# Altium PCB ECE1895_Upsilon_PCB_Iteration1.PcbDoc
Units mil, origin at the board's own origin, x right, y up, seen from the top; angles counter-clockwise.
Board outline 3585 x 2320 mil, 2 copper layers (Top Layer, Bottom Layer); 22 components, 22 nets, 108 pads, 0 vias.
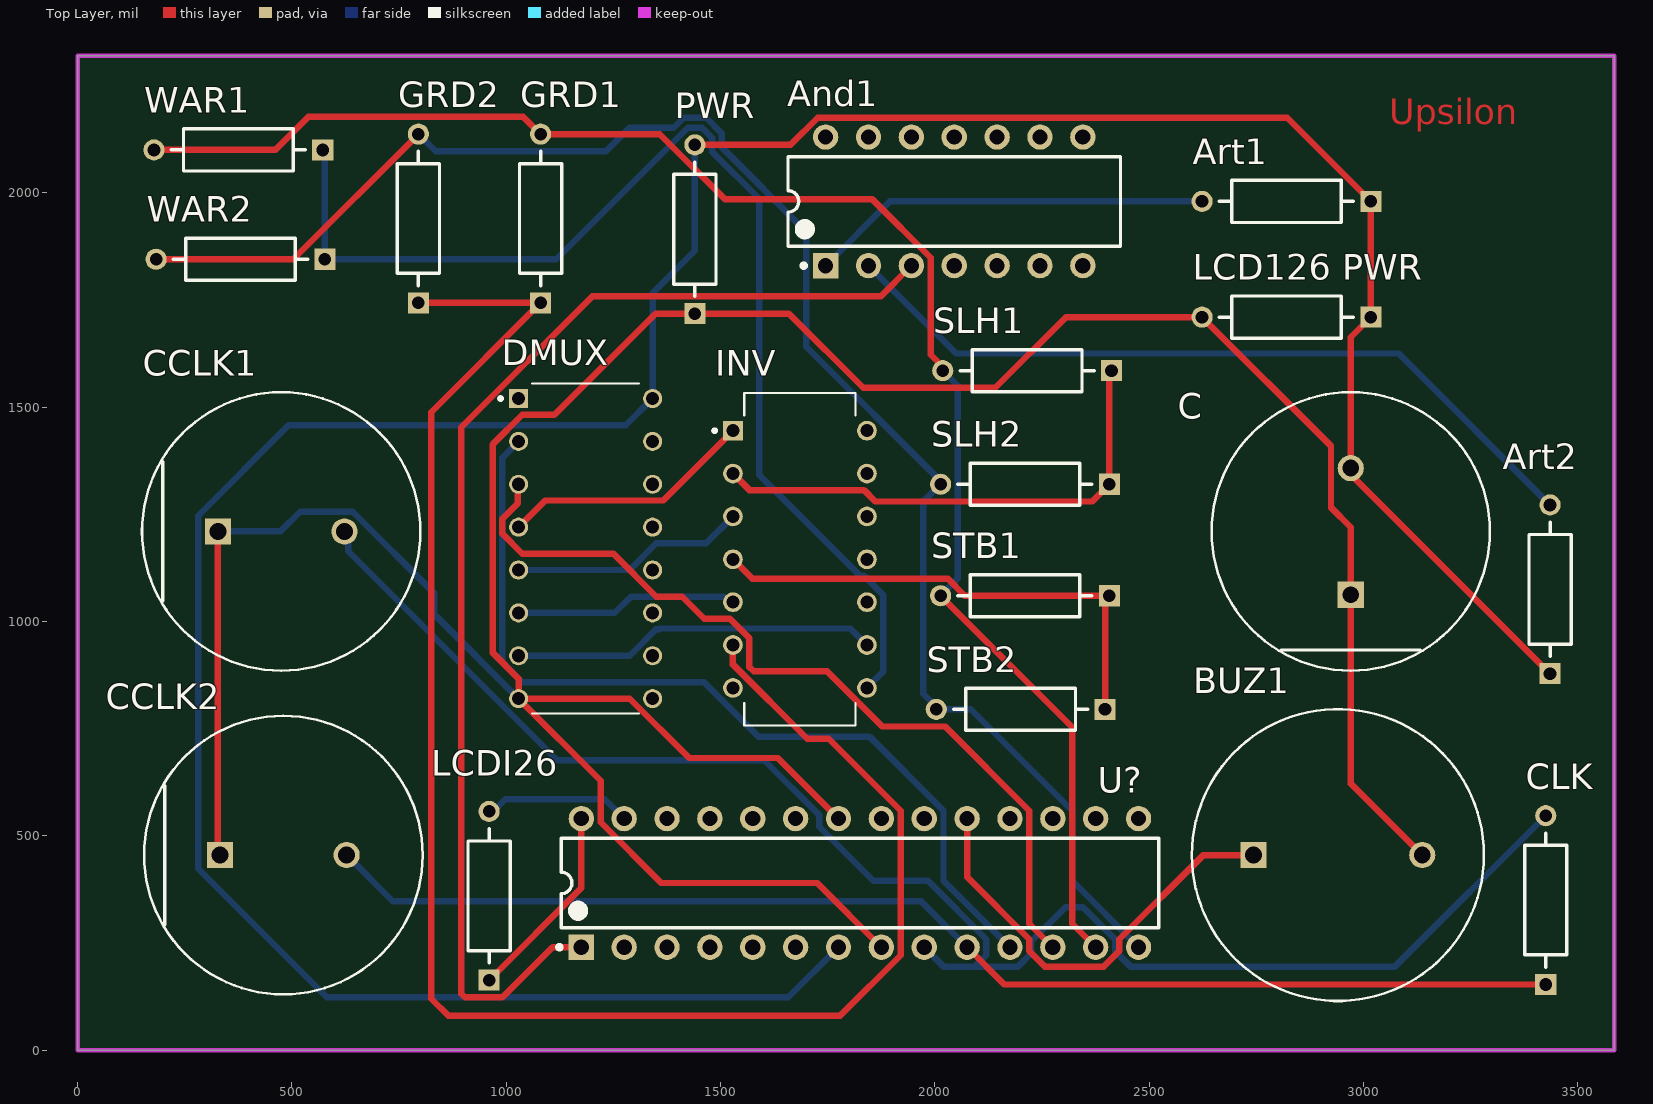
[diagram p0: Top Layer view]
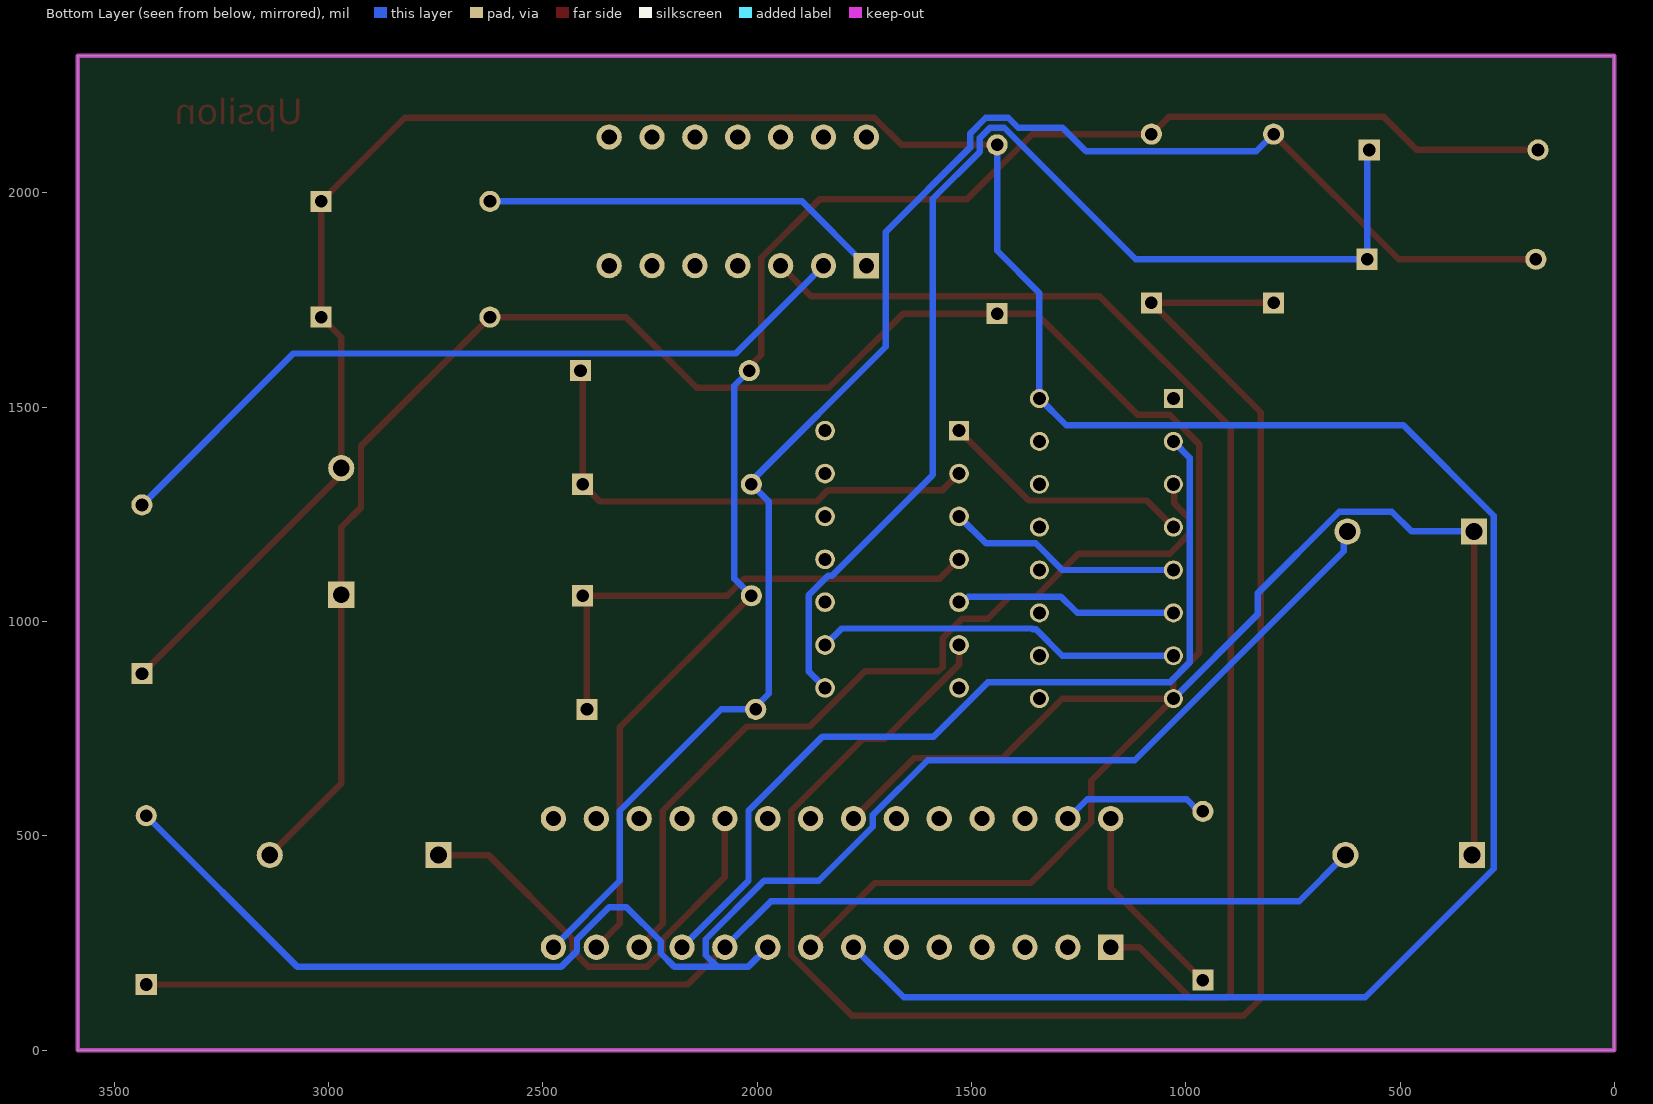
[diagram p1: Bottom Layer view, seen from below]
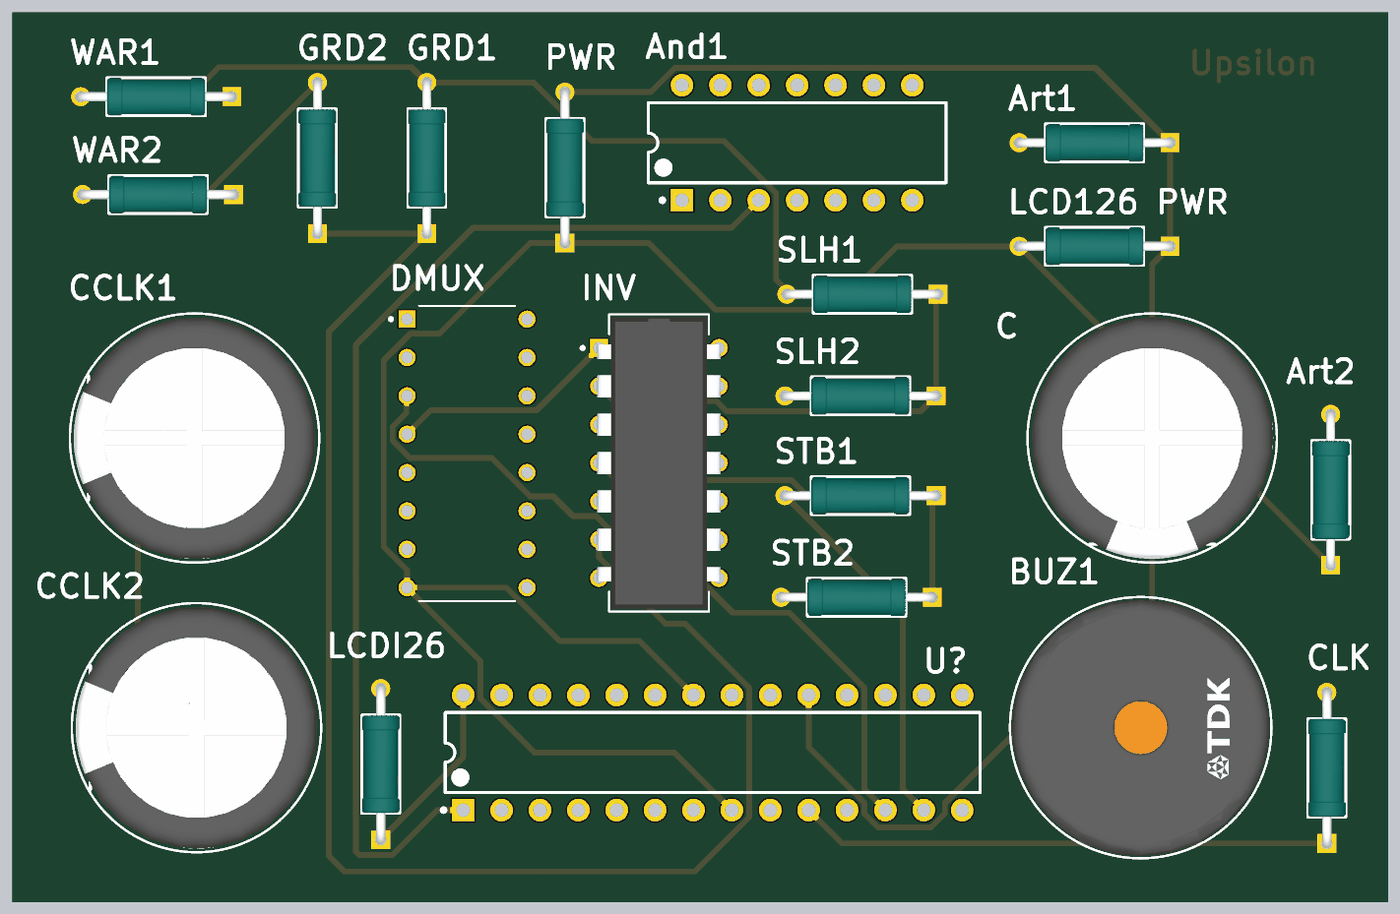
[diagram p2: 3D render of the assembled board from above, using the file's embedded part models]

## Layer stack, top to bottom
Top Solder: solder mask 0.4, Solder Resist, Dk 3.5
Top Layer: signal copper 1.4
Dielectric 1: dielectric 12.6, FR-4, Dk 4.8
Bottom Layer: signal copper 1.4
Bottom Solder: solder mask 0.4, Solder Resist, Dk 3.5

## Board outline
0,0 3585,0 3585,2320 0,2320

## Design rules (kind name [scope] priority, off if disabled: settings)
BoardOutlineClearance [All] p1: gap=7.87 ignorepadtopadclearanceinfootprint=FALSE except(15.75: Arc-SplitBarrior Arc-SplitContinuation Track-SplitBarrior Track-SplitContinuation SMDPad-SplitBarrior SMDPad-SplitContinuation THPad-SplitBarrior THPad-SplitContinuation Via-SplitBarrior Via-SplitContinuation Fill-SplitBarrior Fill-SplitContinuation Poly-SplitBarrior Poly-SplitContinuation Region-SplitBarrior Region-SplitContinuation Text-SplitBarrior Text-SplitContinuation)
Clearance "Clearance Bottom Layer" [OnLayer('Bottom Layer')] p1: gap=8 ignorepadtopadclearanceinfootprint=TRUE except(10: Arc-Text Track-Text SMDPad-Text THPad-Text Via-Text Fill-Text Poly-Text Region-Text Text-Text)
Clearance "Clearance Top Layer" [OnLayer('Top Layer')] p2: gap=8 ignorepadtopadclearanceinfootprint=TRUE except(10: Arc-Text Track-Text SMDPad-Text THPad-Text Via-Text Fill-Text Poly-Text Region-Text Text-Text)
Clearance [All] p3: gap=7.87 ignorepadtopadclearanceinfootprint=FALSE except(3.5: Arc-Arc Arc-Track Arc-SMDPad Track-Track Track-SMDPad SMDPad-SMDPad; 5: Arc-Via Track-Via SMDPad-Via THPad-Via Via-Via; 10: Arc-Text Track-Text SMDPad-Text THPad-Text Via-Text Fill-Text Poly-Text Region-Text Text-Text)
HoleSize [All] p1: absolutevalues=TRUE maxlimit=248.03 minlimit=7.87 maxpercent=80.000 minpercent=20.000
MinimumAnnularRing [All] p1: minimumring=3
MinimumSolderMaskSliver [All] p1: minsoldermaskwidth=3.94
PolygonConnect PolygonConnect_1 [All] p1: thpad.connectstyle=Relief thpad.reliefconductorwidth=20 thpad.reliefentries=4 thpad.polygonreliefangle="90 Angle" thpad.airgapwidth=10 smdpad.connectstyle=Relief smdpad.reliefconductorwidth=20 smdpad.reliefentries=4 smdpad.polygonreliefangle="90 Angle" smdpad.airgapwidth=10 via.connectstyle=Direct via.reliefconductorwidth=20 via.reliefentries=4 via.polygonreliefangle="90 Angle" via.airgapwidth=10
RoutingCorners [All] p1: cornerstyle=Round minsetback=100 maxsetback=100
RoutingVias [All] p1: holewidth=19.68 width=39.37 viastyle="Through Hole" minholewidth=7.87 minwidth=17.72 maxholewidth=39.37 maxwidth=78.74
SilkToSilkClearance [All] p1: silktosilkclearance=3.94
SilkToSolderMaskClearance [IsPad] p1: minsilkscreentomaskgap=3.94 clearancetoexposedcopper=TRUE
SolderMaskExpansion [All] p1: expansion=4 istentingtop=FALSE
Width [All] p1: maxlimit=100 minlimit=3.5 preferedwidth=15
25 further rules are at their usual default settings.

## Components (designator, comment, footprint, x,y, rotation, side; value= is the part's Value field where it differs from the comment)
And1 "" N0014A 2045,1980 r90 top
Art1 "" FP-MRS25-MFG 2820,1980 r180 top
Art2 "" FP-MRS25-MFG 3435,1075 r90 top
BUZ1 "" FP-PS1720P02-MFG 2940,455 r0 top
C "100uf" FP-RAD-TH-D_16_0_5-L_25_2-MFG 2970,1210 r90 top
CCLK1 "" FP-RAD-TH-D_16_0_5-L_25_2-MFG 475,1210 r0 top
CCLK2 "" FP-RAD-TH-D_16_0_5-L_25_2-MFG 480,455 r0 top
CLK "" FP-MRS25-MFG 3425,350 r90 top
DMUX "" DIP794W45P254L1969H508Q16 1185,1170 r0 top
GRD1 "" FP-MRS25-MFG 1080,1940 r90 top
GRD2 "" FP-MRS25-MFG 795,1940 r90 top
INV "" DIP794W45P254L1969H508Q14 1685,1145 r0 top
"LCD126 PWR" "" FP-MRS25-MFG 2820,1710 r180 top
LCDI26 "" FP-MRS25-MFG 960,360 r90 top
PWR "" FP-MRS25-MFG 1440,1915 r90 top
SLH1 "" FP-MRS25-MFG 2215,1585 r180 top
SLH2 "" FP-MRS25-MFG 2210,1320 r180 top
STB1 "" FP-MRS25-MFG 2210,1060 r180 top
STB2 "" FP-MRS25-MFG 2200,795 r180 top
U? "ATmega328P-PU" 28P3 1825,390 r90 top
WAR1 "" FP-MRS25-MFG 375,2100 r180 top
WAR2 "" FP-MRS25-MFG 380,1845 r180 top

## Footprints (in the part's own frame and the unit in brackets; to place one, negate y for a bottom-side part, rotate by r counter-clockwise, add the part's x,y. Pads: shape width x height; smd on the part's side, far side on the other; paste and mask are expansions set on the pad)
28P3 [mm] "28-Pin Plastic Dual In-Line Package (PDIP)"
  rect 1.5x1.5 hole 0.9: 1(-3.81,16.51)
  round 1.5 hole 0.9: 2(-3.81,13.97) 3(-3.81,11.43) 4(-3.81,8.89) 5(-3.81,6.35) 6(-3.81,3.81) 7(-3.81,1.27) 8(-3.81,-1.27) 9(-3.81,-3.81) 10(-3.81,-6.35) 11(-3.81,-8.89) 12(-3.81,-11.43) 13(-3.81,-13.97) 14(-3.81,-16.51) 15(3.81,-16.51) 16(3.81,-13.97) 17(3.81,-11.43) 18(3.81,-8.89) 19(3.81,-6.35) 20(3.81,-3.81) 21(3.81,-1.27) 22(3.81,1.27) 23(3.81,3.81) 24(3.81,6.35) 25(3.81,8.89) 26(3.81,11.43) 27(3.81,13.97) 28(3.81,16.51)
  silkscreen extent -3.93,-17.7 2.65,17.93, body extent -3.6,-17.65 3.6,17.65, height 4.58
DIP794W45P254L1969H508Q14 [mm]
  rect 1.17x1.17 / inner round 1.17 / far side rect 1.17x1.17 hole 0.77: 1(-3.97,7.62)
  round 1.17 hole 0.77: 2(-3.97,5.08) 3(-3.97,2.54) 4(-3.97,0) 5(-3.97,-2.54) 6(-3.97,-5.08) 7(-3.97,-7.62) 8(3.97,-7.62) 9(3.97,-5.08) 10(3.97,-2.54) 11(3.97,0) 12(3.97,2.54) 13(3.97,5.08) 14(3.97,7.62)
  silkscreen extent -5.15,-9.84 3.3,9.84, body extent -4.1,-9.65 4.1,9.65, height 5.08
DIP794W45P254L1969H508Q16 [mm]
  rect 1.13x1.13 hole 0.78: 1(-3.97,8.89)
  round 1.13 hole 0.78: 2(-3.97,6.35) 3(-3.97,3.81) 4(-3.97,1.27) 5(-3.97,-1.27) 6(-3.97,-3.81) 7(-3.97,-6.35) 8(-3.97,-8.89) 9(3.97,-8.89) 10(3.97,-6.35) 11(3.97,-3.81) 12(3.97,-1.27) 13(3.97,1.27) 14(3.97,3.81) 15(3.97,6.35) 16(3.97,8.89)
  silkscreen extent -5.13,-9.77 3.17,9.77
FP-MRS25-MFG [mm]
  rect 1.25x1.25 hole 0.75 paste-2539.97 mask+0: 1(-5,0)
  round 1.25 hole 0.75 paste-2539.97 mask+0: 2(5,0)
  silkscreen extent -3.98,-1.25 3.98,1.25, body extent -5.72,-1.35 5.72,1.35, height 0.25
FP-PS1720P02-MFG [mm]
  rect 1.55x1.55 hole 1 paste-2539.97 mask+0: 1(-5,0)
  round 1.55 hole 1 paste-2539.97 mask+0: 2(5,0)
  silkscreen extent -8.65,-8.65 8.65,8.65, body extent -8.75,-8.75 8.75,8.75, height 0.25
FP-RAD-TH-D_16_0_5-L_25_2-MFG [mm]
  rect 1.55x1.55 hole 1 paste-2539.97 mask+0: 1(-3.75,0)
  round 1.55 hole 1 paste-2539.97 mask+0: 2(3.75,0)
  silkscreen extent -8.25,-8.25 8.25,8.25, body extent -8.35,-8.35 8.35,8.35, height 0.25
N0014A [mm] "DIP, 14-Leads, Body 19.7x6.6mm, Pitch 2.54mm"
  rect 1.5x1.5 hole 0.9: 1(-3.81,7.62)
  round 1.5 hole 0.9: 2(-3.81,5.08) 3(-3.81,2.54) 4(-3.81,0) 5(-3.81,-2.54) 6(-3.81,-5.08) 7(-3.81,-7.62) 8(3.81,-7.62) 9(3.81,-5.08) 10(3.81,-2.54) 11(3.81,0) 12(3.81,2.54) 13(3.81,5.08) 14(3.81,7.62)
  silkscreen extent -3.93,-9.85 2.65,9.85, body extent -3.95,-9.85 3.95,9.85, height 5.08

## Part data
And1: library part CMP-0777-00278-3, "Quadruple 2-Input Positive-AND Gates, N0014A, TUBE", F @ Nom Voltage(Max)(Mhz)=70, Generic Part Number=SN74AHCT08, ICC @ Nom Voltage(Max)(mA)=0.02, Manufacturer="Texas Instruments", Operating Temperature Range(C)="-40 to 125,-40 to 85", Rating=Catalog, tpd @ Nom Voltage(Max)(ns)=8, Voltage(Nom)(V)=5, Bits(#)=4, DatasheetVersion=SCLS237M, Input Type=TTL, Output Drive (IOL/IOH)(Max)(mA)=-8/8, Output Type=CMOS, PackageReference=N0014A, Schmitt Trigger=No, Technology Family=AHCT, VCC(Max)(V)=5.5, VCC(Min)(V)=4.5
Art1 Art2 CLK GRD1 GRD2 "LCD126 PWR" LCDI26 PWR SLH1 SLH2 STB1 STB2 WAR1 WAR2: library part CMP-02408-000051-1, "RES 1K OHM 0.6W 1% AXIAL", Case/Package=Axial, Max Operating Temperature=155°C, Max Power Dissipation=600mW, Min Operating Temperature=-55°C, Package Quantity=5000, Resistance=1kR, Resistance Tolerance=1%, Resistor Type="Metal Film", Temperature Coefficient=50ppm/°C, Voltage Rating=350V, Construction=Cylindrical, Contact Plating=Tin, Diameter=2.5mm, Lead Diameter=0.6mm, Lead Free="Lead Free", Length=6.5mm, Military Standard=Not, Mount="Through Hole", Number of Pins=2, Number of Terminations=2, Packaging="Tape and Reel", Power Rating=600mW, Radiation Hardening=No, RoHS Compliant=Yes, Series=MRS25, Technology="THIN FILM", Termination=Axial, Tolerance=1%, Voltage Rating (DC)=350V, Weight=0.00776oz, Width=2.5mm
BUZ1: library part CMP-08413-000001-1, "AUDIO PIEZO TRANSDUCER 30V TH", Frequency=2kHz, Manufacturer="TDK Corporation", Manufacturer Part Number=PS1720P02, Package=0, Temperature="-10°C to +70°C", Temperature Range High=+70°C, Temperature Range Low=-10°C, Automotive=No, Category=Speak, ComponentLink2Description=Datasheet, ComponentLink2URL=https://product.tdk.com/info/en/catalog/datasheets/piezoelectronic_buzzer_ps_en.pdf, Device Class L1=Electromechanical, Device Class L2="Audio Products", Device Class L3=Buzzers, Digikey Description="AUDIO PIEZO TRANSDUCER 30V TH", Height=8.3mm, Lead Free=Yes, Mouser Description="Audio Indicators & Alerts Round 17mmx8mm 2 kHz Vin=3V", Octopart=https://octopart.com/ps1720p02-tdk-154429, RoHS=TRUE, Standoff Height=0.5mm
C CCLK1 CCLK2: library part CMP-05427-001116-1, "Aluminum Electrolytic Capacitors (Radial Lead Type) 47uF ±20% 400V", Capacitance=47uF, Case/Package=Radial, Dielectric Material=Aluminium, Leakage Current=1.138mA, Max Operating Temperature=105°C, Min Operating Temperature=-25°C, Package Quantity=100, Ripple Current=1.18A, Tolerance=20%, Voltage=400V, Construction=RADIAL, Diameter=16mm, Dissipation Factor=0.24%, Height=25mm, Height - Seated (Max)=0.984inch, Lead Diameter=0.8mm, Lead Free="Lead Free", Lead Pitch=7.5mm, Length=25mm, Life (Hours)=10000Hour, Mount="Through Hole", Number of Pins=2, Packaging=Bulk, Radiation Hardening=No, REACH SVHC="No SVHC", Ripple Current (AC)=1.18A, RoHS Compliant=Yes, Series=EE, Termination=Radial, Voltage Rating=400V, Voltage Rating (DC)=400V
DMUX: library part SN74HC139N, "Dual 2-Line To 4-Line Decoders/Demultiplexers 16-PDIP -40 to 85", Package="PDIP-16 Texas Instruments", Availability=Unavailable, DigiKey-Purchase-URL=https://snapeda.com/shop?store=DigiKey&id=572560, MF="Texas Instruments", Mouser-Purchase-URL=https://snapeda.com/shop?store=Mouser&id=572560, MP=SN74HC139N, Price=None, SnapEDA_Link=https://www.snapeda.com/parts/SN74HC139N/Texas%20Instruments/view-part/572560/?ref=snap, Texas_Instruments-Purchase-URL=https://snapeda.com/shop?store=Texas+Instruments&id=572560
INV: library part SN7404N, "6-ch, 4.75-V to 5.25-V bipolar inverters", Package="PDIP-14 Texas Instruments", Availability="In Stock", Check_prices=https://www.snapeda.com/parts/SN7404N/Texas+Instruments/view-part/?ref=eda, MF="Texas Instruments", MP=SN7404N, Price=None, Purchase-URL=https://pricing.snapeda.com/search/part/SN7404N/?ref=eda, SnapEDA_Link=https://www.snapeda.com/parts/SN7404N/Texas+Instruments/view-part/?ref=snap
U?: library part CMP-0095-00013-2, "8-bit AVR Microcontroller, 32KB Flash, 1KB EEPROM, 2KB SRAM, 28-pin PDIP, Industrial Grade (-40°C to 85°C)", ComponentLink1Description="Manufacturer URL", ComponentLink1URL=http://www.atmel.com/, ComponentLink2Description="ATmega48A/48PA/88A/88PA/168A/168PA/328/328P Datasheet", ComponentLink2URL=http://www.atmel.com/dyn/resources/prod_documents/8271.pdf, ComponentLink3Description="ATmega48A/48PA/88A/88PA/168A/168PA/328/328P Summary", ComponentLink3URL=http://www.atmel.com/dyn/resources/prod_documents/8271S.pdf, DatasheetVersion="revD, May-2011", PackageDescription="28-lead (0.300\"/7.62mm Wide) Plastic Dual Inline Package (PDIP)", PackageReference=28P3, PackageVersion="revB, Sep-2001", RevisionNote="DatasheetVersion updated. URLs added."

## Nets (pads, with @x,y where several pads share a name; then routed paths per layer and width w, separated by ;. In a path a pad name is that pad's centre, name@x,y a point inside that pad or via, vN(x,y) a via of type N, cw(c..) or ccw(c..) an arc to the next point about the centre after c; other vN are vias at no path point)
GND: "LCD126 PWR.2" BUZ1.2 C.1 CCLK1.1 CCLK2.1 DMUX.8 PWR.1 U?.8 U?.22 | length 7700.1
  Top Layer w15: CCLK1.1 327.36,460 CCLK2.1 ; U?.22 1633.61,681.39 1426.53,681.39 1287.92,820 DMUX.8 ; U?.8 1725.14,389.86 1361.46,389.86 1220.03,531.29 1220.03,628.67 DMUX.8 ; BUZ1.2 2970,621.85 C.1 2970,1219.63 2923.99,1265.64 2923.99,1409.16 2623.15,1710 2305.78,1710 2140.67,1544.89 1832.56,1544.89 1659.31,1718.15 PWR.1 1348.18,1718.15 1112.29,1482.26 1037.58,1482.26 967.96,1412.63 967.96,927.37 1028.7,866.62 DMUX.8
  Bottom Layer w15: CCLK1.1 473.03,1210 519.04,1256.01 641.7,1256.01 832.38,1065.33 832.38,1016.32 DMUX.8
NetAnd1_1: And1.1 Art1.2 | length 940.3
  Bottom Layer w15: And1.1 1895,1980 Art1.2
NetAnd1_2: And1.2 Art2.2 | length 1821.2
  Bottom Layer w15: And1.2 2049.89,1625.11 3081.74,1625.11 Art2.2
NetAnd1_3: And1.3 U?.1 | length 2859.2
  Top Layer w15: U?.1 1107.98,240 991.03,123.04 903.79,123.04 895,131.83 895,1452.71 1200.55,1758.26 1873.26,1758.26 And1.3
NetArt1_1: "LCD126 PWR.1" Art1.1 Art2.1 C.2 DMUX.16 PWR.2 U?.7 | length 7293.7
  Top Layer w15: PWR.2 1663.17,2111.85 1726.35,2175.03 2821.82,2175.03 Art1.1 3016.85,1710 2970,1663.15 C.2 2978.81,1348.83 2978.81,1334.34 Art2.1
  Bottom Layer w15: PWR.2 1440,1864.64 1341.3,1765.94 DMUX.16 1279.04,1457.74 492.16,1457.74 281.35,1246.93 281.35,423.07 581.38,123.04 1658.04,123.04 U?.7
NetBUZ1_1: BUZ1.1 U?.19 | length 1030.7
  Top Layer w15: U?.19 2075,403.68 2220.03,258.65 2220.03,231.29 2256.35,194.97 2393.65,194.97 2429.97,231.29 2429.97,258.65 2626.32,455 BUZ1.1
NetCCLK1_2: CCLK1.2 CLK.2 U?.9 | length 3765.4
  Bottom Layer w15: CCLK1.2 631.44,1201.19 631.44,1163.88 1118.79,676.54 1602.14,676.54 1729.97,548.71 1729.97,521.35 1856.35,394.97 1983.71,394.97 2120.03,258.65 2120.03,221.35 2093.65,194.97 ; U?.9 2020.03,194.97 2093.65,194.97 ; CLK.2 3073.12,194.97 2456.35,194.97 2420.03,231.29 2420.03,258.65 2344.89,333.79 2305.11,333.79 2225,253.68 2225,226.32 2193.65,194.97 2093.65,194.97
NetCCLK2_2: CCLK2.2 CLK.1 U?.10 | length 2922.4
  Top Layer w15: U?.10 2161.85,153.15 CLK.1
  Bottom Layer w15: CCLK2.2 735.33,347.31 1967.69,347.31 U?.10
NetDMUX_2: DMUX.2 U?.11 | length 2086.4
  Bottom Layer w15: DMUX.2 990.96,1382.26 990.96,904.37 1037.58,857.74 1461.47,857.74 1587.7,731.51 1847.17,731.51 2020.03,558.65 2020.03,394.97 U?.11
NetDMUX_3: DMUX.3 U?.12 | length 2008.7
  Top Layer w15: DMUX.3 1026.89,1318.19 1026.89,1275.26 990.96,1239.32 990.96,1204.37 1037.58,1157.74 1250.18,1157.74 1350.18,1057.74 1410.31,1057.74 1461.59,1006.47 1521.72,1006.47 1567.23,960.96 1567.23,893.49 1577.19,883.53 1748.28,883.53 1876.91,754.89 2023.78,754.89 2220.03,558.65 2220.03,294.97 U?.12
NetDMUX_4: DMUX.4 INV.1 | length 593.2
  Top Layer w15: DMUX.4 1090.96,1282.26 1365.96,1282.26 INV.1
NetDMUX_5: DMUX.5 INV.3 | length 551.8
  Bottom Layer w15: DMUX.5 1287.92,1120 1350.18,1182.26 1465.96,1182.26 INV.3
NetDMUX_6: DMUX.6 INV.5 | length 520.9
  Bottom Layer w15: DMUX.6 1253.24,1020 1290.99,1057.74 1507.55,1057.74 1520.3,1045 INV.5
NetDMUX_7: DMUX.7 INV.9 | length 854.9
  Bottom Layer w15: DMUX.7 1287.92,920 1350.18,982.26 1356.93,982.26 1358.21,983.53 1802.77,983.53 INV.9
NetGRD1_1: GRD1.1 GRD2.1 INV.6 | length 4099.2
  Top Layer w15: GRD2.1 GRD1.1 825,1488.15 825,120 865,80 1778.68,80 1920.03,221.35 1920.03,558.65 1752.58,726.1 1702.09,726.1 1528.72,899.47 INV.6
NetGRD1_2: GRD1.2 SLH1.2 STB1.2 U?.13 WAR1.2 | length 3781.1
  Top Layer w15: WAR1.2 461.03,2100 537.99,2176.96 1039.89,2176.96 GRD1.2 1358.28,2136.85 1510.63,1984.51 1854.17,1984.51 1990.03,1848.65 1990.03,1622.38 2018.15,1594.26 SLH1.2 ; STB1.2 2320.03,753.12 2320.03,294.97 U?.13
  Bottom Layer w15: STB1.2 2053.26,1100.11 2053.26,1549.89 SLH1.2
NetGRD2_2: GRD2.2 SLH2.2 STB2.2 U?.14 WAR2.2 | length 3886.1
  Top Layer w15: WAR2.2 503.15,1845 GRD2.2
  Bottom Layer w15: GRD2.2 835.11,2096.74 1232.39,2096.74 1287.61,2151.96 1390.86,2151.96 1413.86,2174.96 1466.14,2174.96 1503.11,2137.99 1503.11,2105.46 1699.97,1908.6 1699.97,1640.82 2013.15,1327.64 SLH2.2 1973.04,1279.89 1973.04,831.51 2003.15,801.41 STB2.2 2083.68,795 2320.03,558.65 2320.03,394.97 U?.14
NetINV_2: INV.2 SLH1.1 SLH2.1 | length 1188.8
  Top Layer w15: INV.2 1567.23,1306.47 1834.32,1306.47 1860.9,1279.89 2366.74,1279.89 SLH2.1 2406.85,1580 SLH1.1
NetINV_4: INV.4 STB1.1 STB2.1 | length 1182.5
  Top Layer w15: INV.4 1573.59,1100.11 2029.76,1100.11 2069.87,1060 STB1.1 2396.85,1050 STB2.1
NetINV_8: INV.8 WAR1.1 WAR2.1 | length 2767.5
  Bottom Layer w15: WAR1.1 576.85,2095 WAR2.1 1116.43,1845 1423.39,2151.96 1456.61,2151.96 1480.11,2128.46 1480.11,2095.94 1590,1986.04 1590,1341.81 1825.34,1106.47 1834.32,1106.47 1879.83,1060.96 1879.83,883.53 INV.8
NetLCDI26_1: LCDI26.1 U?.28 | length 465.9
  Top Layer w15: LCDI26.1 1175,378.15 U?.28
NetLCDI26_2: LCDI26.2 U?.27 | length 345.3
  Bottom Layer w15: LCDI26.2 969.26,556.85 997.44,585.03 1229.97,585.03 U?.27
pads on no net: And1.4 And1.5 And1.6 And1.7 And1.8 And1.9 And1.10 And1.11 And1.12 And1.13 And1.14 DMUX.1 DMUX.9 DMUX.10 DMUX.11 DMUX.12 DMUX.13 DMUX.14 DMUX.15 INV.7 INV.10 INV.11 INV.12 INV.13 INV.14 U?.2 U?.3 U?.4 U?.5 U?.6 U?.15 U?.16 U?.17 U?.18 U?.20 U?.21 U?.23 U?.24 U?.25 U?.26

## Keep-outs
Keep-Out Layer:
  the board outline again, w10

## Other copper
Top Layer:
  text "Upsilon" at 3060,2159.99 h60